# Altium PCB RS485_XBus_Mini.PcbDoc
Units mm, origin at the board's own origin, x right, y up, seen from the top; angles counter-clockwise.
Board outline 48.48 x 24.47 mm, 2 copper layers (Top Layer, Bottom Layer); 57 components, 45 nets, 161 pads, 39 vias.
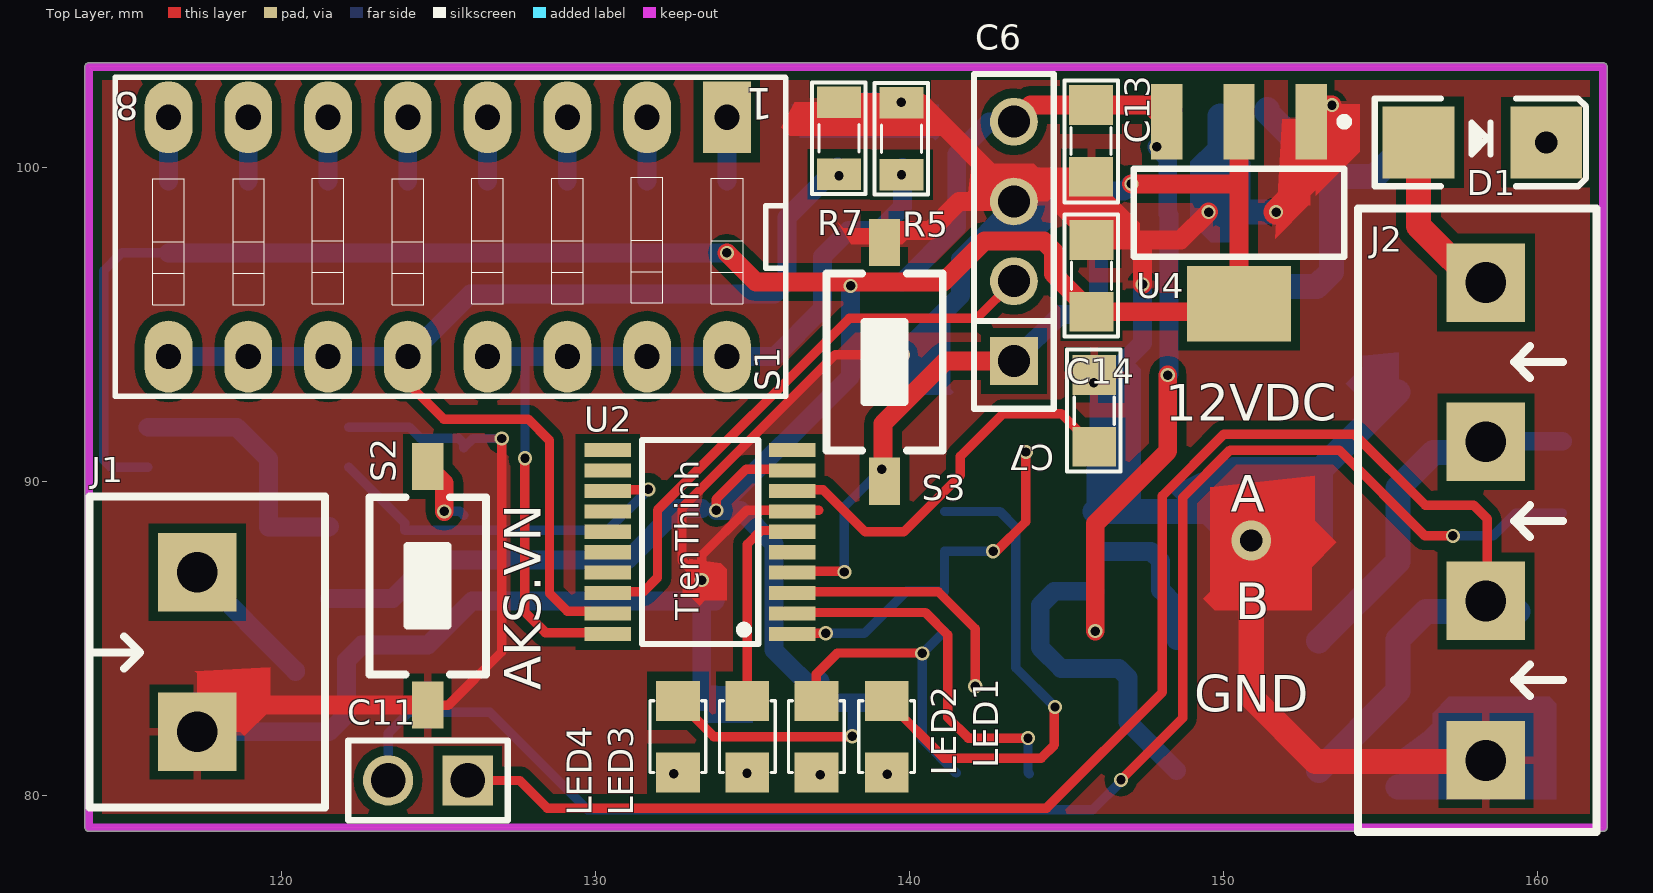
[diagram p0: Top Layer view]
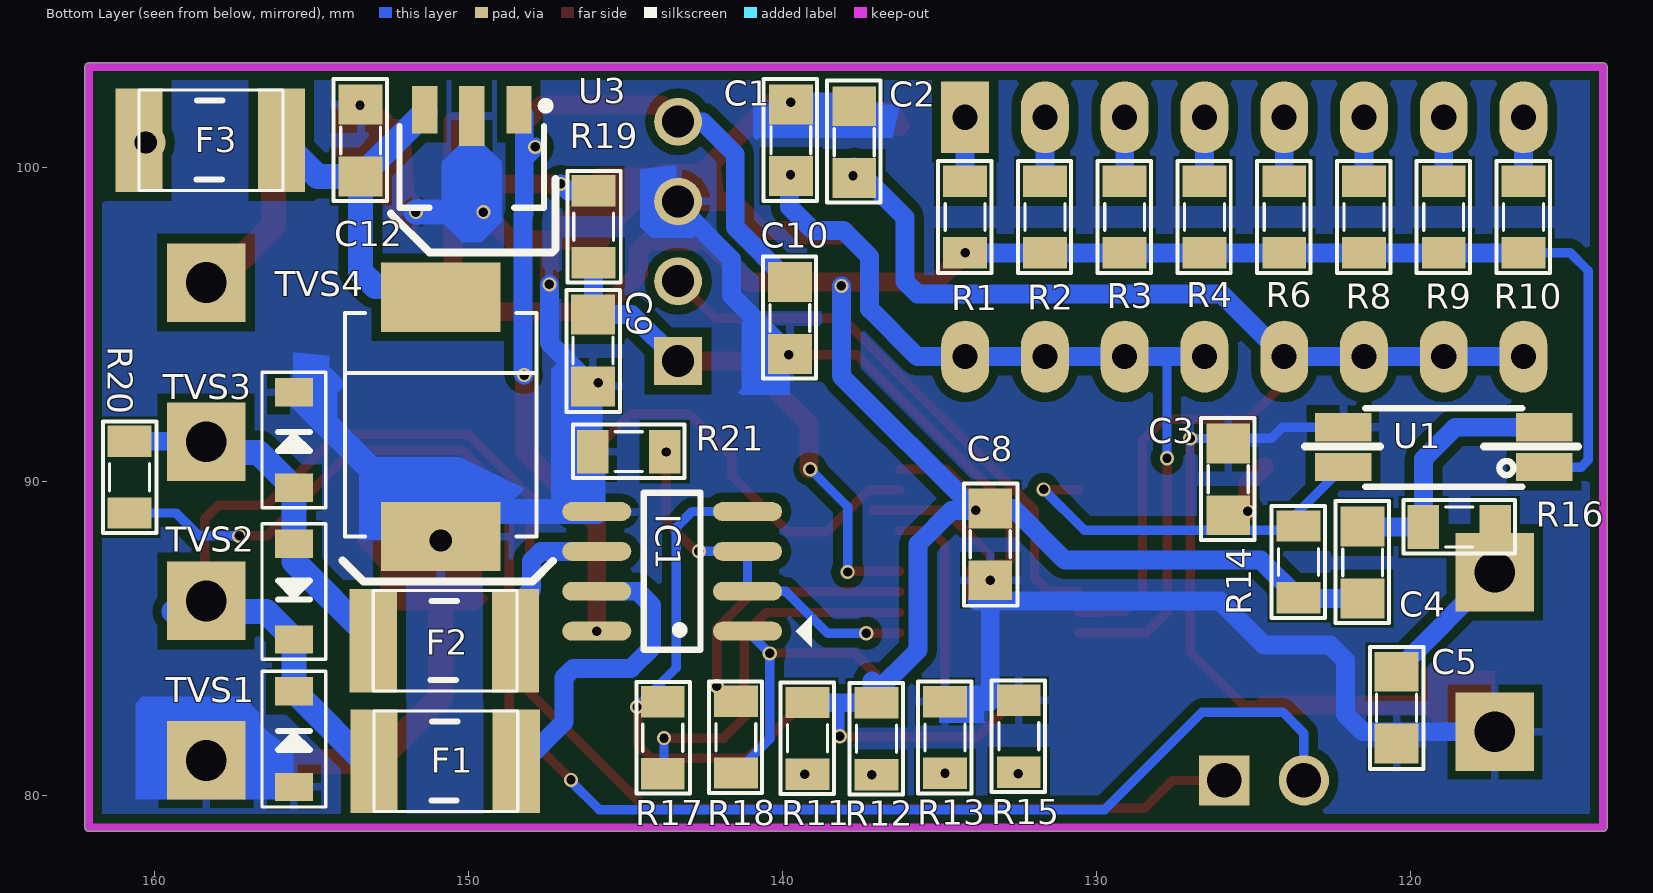
[diagram p1: Bottom Layer view, seen from below]
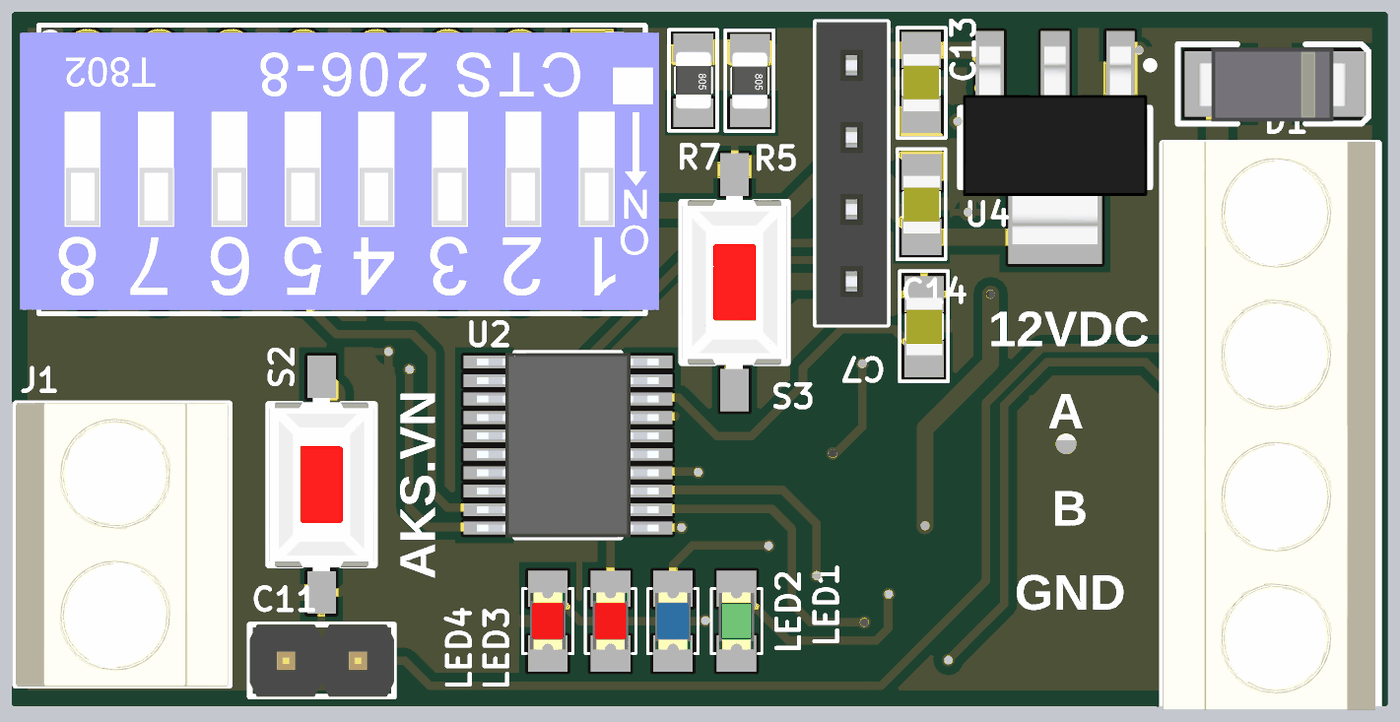
[diagram p2: 3D render of the assembled board from above, using the file's embedded part models]
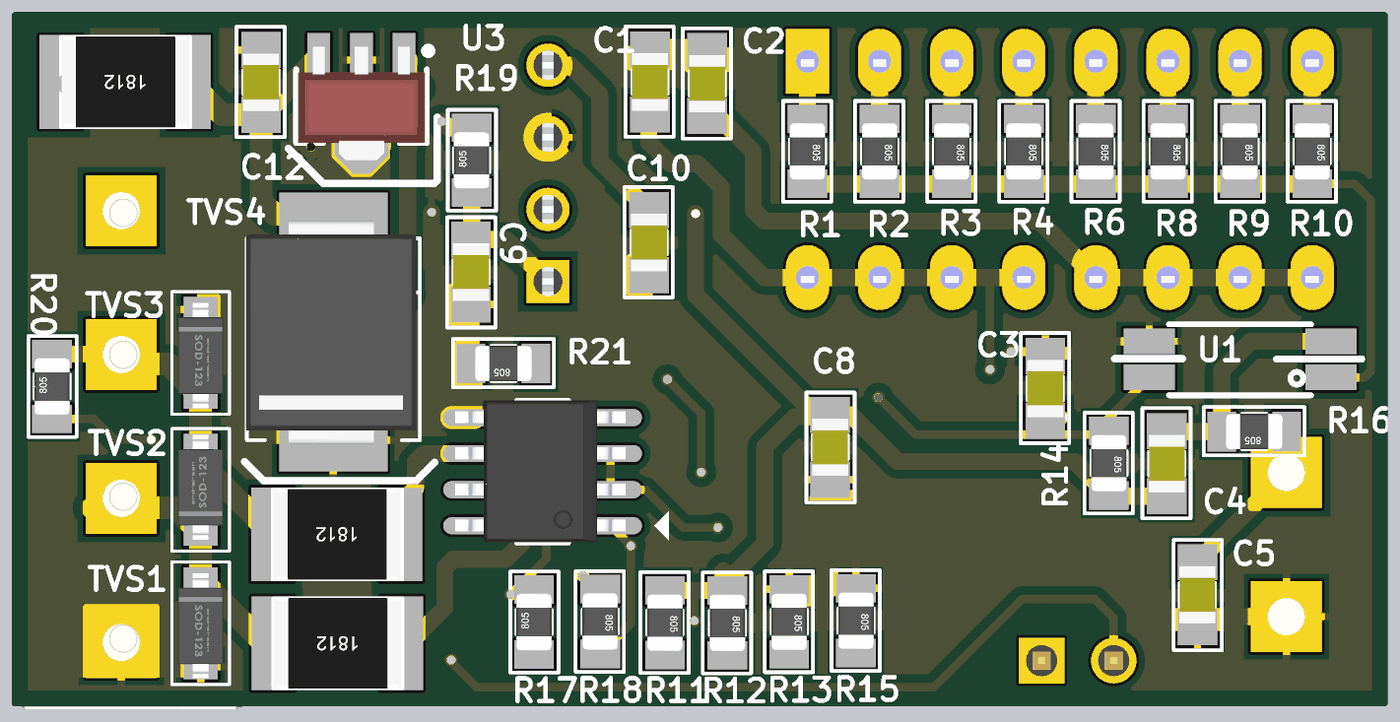
[diagram p3: 3D render of the assembled board from below, using the file's embedded part models]

## Layer stack, top to bottom
Top Solder: solder mask 0.0102, Solder Resist, Dk 3.5
Top Layer: signal copper 0.0356
Dielectric 1: dielectric 0.32, FR-4, Dk 4.8
Bottom Layer: signal copper 0.0356
Bottom Solder: solder mask 0.0102, Solder Resist, Dk 3.5

## Board outline
113.751,78.98 ccw(c113.878,78.98) 113.878,78.853 162.108,78.853 ccw(c162.108,78.98) 162.235,78.98 162.235,103.199 ccw(c162.108,103.199) 162.108,103.326 113.878,103.326 ccw(c113.878,103.199) 113.751,103.199

## Design rules (kind name [scope] priority, off if disabled: settings)
Clearance [All] p1: gap=0.2 ignorepadtopadclearanceinfootprint=FALSE
PolygonConnect [All] p1: connectstyle=Relief reliefconductorwidth=0.254 reliefentries=4 polygonreliefangle="90 Angle" airgapwidth=0.254
RoutingVias [All] p1: holewidth=0.3 width=0.45 viastyle="Through Hole" minholewidth=0.3 minwidth=0.45 maxholewidth=0.8 maxwidth=1.27
SolderMaskExpansion [All] p1: expansion=0.102
Width [All] p1: maxlimit=0.8 minlimit=0.3 preferedwidth=0.6
30 further rules are at their usual default settings.

## Components (designator, comment, footprint, x,y, rotation, side; value= is the part's Value field where it differs from the comment)
C1 "104" SM-0805 139.75,100.86 r270 bottom value=103
C2 "104" SM-0805 137.73,100.8 r270 bottom value=103
C3 "105" SM-0805 125.82,90.06 r270 bottom value=103
C4 "105" SM-0805 121.54,87.41 r270 bottom value=103
C5 "105" SM-0805 120.46,82.79 r90 bottom value=103
C6 "JP4" JP4-C1T 143.34,93.83 r90 top locked
C7 "105" SM-0805 145.9,92.24 r270 top value=103
C8 "105" SM-0805 133.4,87.99 r90 bottom value=103
C9 "104" SM-0805 146.053,94.163 r90 bottom value=103
C10 "104" SM-0805 139.78,95.2 r270 bottom value=103
C11 "JP2" JP2-D1T 125.95,80.47 r180 top
C12 "104" SM-0805 153.45,100.85 r270 bottom value=103
C13 "104" SM-0805 145.796,100.838 r90 top locked value=103
C14 "104" SM-0805 145.81,96.54 r270 top locked value=103
D1 "Diode" DIO-SMD-106 158.26,100.79 r180 top locked
F1 "FUSE" RES-SMD-1812 150.49,81.08 r0 bottom
F2 "FUSE" RES-SMD-1812 150.51,84.92 r0 bottom
F3 "FUSE" RES-SMD-1812 157.97,100.86 r0 bottom
IC1 "MAX485" SO-8 143.53,87.13 r0 bottom
J1 "KF2" KF2-5.08 117.33,84.56 r90 top
J2 "KF4" KF4-5.08 158.37,81.11 r90 top
LED1 "LED" SM-LED-0805-Green 139.29,80.72 r90 top locked
LED2 "LED" SM-LED-0805-Blue 137.05,80.72 r90 top locked
LED3 "LED" SM-LED-0805-Red 134.85,83.006 r270 top locked
LED4 "LED" SM-LED-0805-Red 132.64,83.006 r270 top locked
R1 "82k" RES-SMD-0805 134.198,98.415 r270 bottom
R2 "43k" RES-SMD-0805 131.658,98.415 r270 bottom
R3 "22k" RES-SMD-0805 129.118,98.415 r270 bottom
R4 "12k" RES-SMD-0805 126.578,98.415 r270 bottom
R5 "12k" RES-SMD-0805 139.76,100.907 r270 top locked
R6 "82k" RES-SMD-0805 124.038,98.415 r270 bottom
R7 "12k" RES-SMD-0805 137.77,100.92 r270 top locked
R8 "43k" RES-SMD-0805 121.498,98.415 r270 bottom
R9 "22k" RES-SMD-0805 118.958,98.415 r270 bottom
R10 "12k" RES-SMD-0805 116.418,98.415 r270 bottom
R11 "330R" RES-SMD-0805 139.22,81.81 r270 bottom
R12 "330R" RES-SMD-0805 137.02,81.8 r270 bottom
R13 "330R" RES-SMD-0805 134.84,81.84 r270 bottom
R14 "10k" RES-SMD-0805 123.58,87.43 r270 bottom
R15 "330R" RES-SMD-0805 132.49,81.88 r270 bottom
R16 "150" RES-SMD-0805 118.46,88.54 r0 bottom
R17 "22R" RES-SMD-0805 143.83,81.83 r90 bottom
R18 "22R" RES-SMD-0805 141.5,81.85 r270 bottom
R19 "10k" RES-SMD-0805 146.03,98.103 r90 bottom
R20 "120R" RES-SMD-0805 160.81,90.13 r90 bottom
R21 "10k" RES-SMD-0805 144.91,90.94 r0 bottom
S1 "=partNo" SW-DIP8 134.198,101.59 r180 top locked
S2 "SW" "BUTTON-SMD 2PIN" 124.67,86.67 r90 top
S3 "SW" "BUTTON-SMD 2PIN" 139.22,93.8 r270 top
TVS1 "PSD12C" DIO-SMD-123 155.575,81.788 r270 bottom
TVS2 "PSD12C" DIO-SMD-123 155.575,86.487 r90 bottom
TVS3 "PSD12C" DIO-SMD-123 155.575,91.313 r270 bottom
TVS4 "PSD12C" DIO-SMD-B 150.9,92.05 r270 bottom
U1 "EL3H7 Opto" SSOP4 114.769,93.025 r0 bottom
U2 "STM8S003F3P6" TSOP20 136.523,91.621 r180 top
U3 "78XX" SOT-89-321 147.294,102.849 r0 bottom
U4 "AMS1117" SOT223 150.51,98.55 r180 top locked

## Footprints (in the part's own frame and the unit in brackets; to place one, negate y for a bottom-side part, rotate by r counter-clockwise, add the part's x,y. Pads: shape width x height; smd on the part's side, far side on the other; paste and mask are expansions set on the pad)
"BUTTON-SMD 2PIN" [mm] "Switch SMD type"
  rect 1.5x1 smd: 1(-3.8,0) 2(3.8,0)
  silkscreen extent -2.82,-1.85 2.82,1.85, body extent -3.05,-1.85 3.05,1.85, height 2.5
DIO-SMD-106 [mil]
  rect 90x90.55 smd: 1(80,0) 2(-80,0)
  silkscreen extent -130,-55 135,55, body extent -99,-50 106,52, height 95
DIO-SMD-123 [mm]
  rect 0.9x1.2 smd: 1(1.524,0) 2(-1.524,0)
  silkscreen extent -2.16,-1.02 2.16,1.02, body extent -1.76,-0.8 1.94,0.8, height 1.25
DIO-SMD-B [mm] "Magnetic-Core Inductor with Winding Polarity Marking; 2 Leads"
  rect 2.2x3.81 smd: 1(3.81,0) 2(-3.81,0)
  silkscreen extent -3.3,-3.05 3.81,3.05, body extent -3.94,-3.08 3.96,2.92, height 2.13
JP2-D1T [mm] "2 pins, 1 row, straight, gold plating"
  rect 1.6x1.6 hole 1.1: 1(0,0)
  round 1.6 hole 1.1: 2(2.54,0)
  silkscreen extent -1.27,-1.27 3.81,1.27, body extent -1.27,-1.27 3.81,1.27, height 8.54
JP4-C1T [mm] "4 row, straight, gold plating"
  rect 1.52x1.52 hole 1.02: 1(0,0)
  round 1.52 hole 1.02: 2(2.54,0) 3(5.08,0) 4(7.62,0)
  silkscreen extent -1.52,-1.27 9.14,1.27, body extent -1.52,-1.25 9.14,1.25, height 8.51
KF2-5.08 [mm]
  rect 2.5x2.5 hole 1.3: 1(-2.54,0) 2(2.54,0)
  silkscreen extent -4.95,-4.08 4.95,3.43, body extent -5,-4.07 5,3.43, height 10
KF4-5.08 [mm]
  rect 2.5x2.5 hole 1.3: 1(0,0) 2(5.08,0) 3(10.147,0) 4(15.215,0)
  silkscreen extent -2.29,-3.53 17.58,4.06, body extent -2.36,-3.43 17.64,4.07, height 10
RES-SMD-0805 [mil]
  rect 39.37x55 smd: 1(-45,0) 2(45,0)
  silkscreen extent -70,-34 70,33, body extent -39,-25 39,25, height 31
RES-SMD-1812 [mm] "Chip Capacitor, Body 3.2x2.5mm, IPC Medium Density"
  rect 1.5x3.3 smd: 1(-1.996,0) 2(2.54,0)
  silkscreen extent -2.04,-1.6 2.54,1.6, body extent -2,-1.6 2.5,1.6, height 0.6
SM-0805 [mil] "Compoment SMD 80x50mil"
  rect 50x55 smd: 1(-45,0) 2(45,0)
  silkscreen extent -77,-34 76,33, body extent -40,-25 40,25, height 24
SM-LED-0805-Blue [mil]
  rect 50x55 smd: 1(0,0) 2(90,0)
  silkscreen extent 0,-35 90,35, body extent 5,-25 85,25, height 43
SM-LED-0805-Green [mil]
  rect 50x55 smd: 1(0,0) 2(90,0)
  silkscreen extent 0,-35 90,35, body extent 5,-25 85,25, height 43
SM-LED-0805-Red [mil]
  rect 50x55 smd: 1(0,0) 2(90,0)
  silkscreen extent 0,-35 90,35, body extent 5,-25 85,25, height 43
SO-8 [mm] "8-Pin Small Outline Integrated Circuit 1.27 mm Pitch, IPC Medium Density"
  oval 2.2x0.6 smd: 1(-2.4,1.905) 2(-2.4,0.635) 3(-2.4,-0.635) 4(-2.4,-1.905) 5(2.4,-1.905) 6(2.4,-0.635) 7(2.4,0.635) 8(2.4,1.905)
  silkscreen extent -4.44,-2.5 0.9,2.5, body extent -2.93,-2.51 3.08,2.49, height 1.75
SOT223 [mm]
  rect 1x2.4 smd: 1(-2.3,-2.9) 2(0,-2.9) 3(2.3,-2.9)
  rect 3.3x2.4 smd: 4(0,2.9)
  silkscreen extent -3.48,-3.02 3.35,1.4, body extent -3.25,-3.56 3.25,3.4, height 1.68
SOT-89-321 [mm]
  rect 0.8x1.5 smd: 1(4.116,1.019) 3(1.116,1.019)
  rect 0.8x1.9 smd: 2(2.616,1.219)
  Top Layer region: 2.316,2.032 1.666,2.682 1.666,4.582 2.316,5.232 2.916,5.232 3.566,4.582 3.566,2.682 2.916,2.032
  silkscreen extent 0.14,0.77 4.92,4.14, body extent 0.37,0.74 4.87,4.74, height 1.5
SSOP4 [mm]
  rect 1.8x0.9 smd: 1(0.991,2.575) 2(0.991,1.305) 3(7.391,1.305) 4(7.391,2.575)
  silkscreen extent 1.69,0.71 6.69,3.2, body extent 1.52,0.64 6.73,3.3, height 2
SW-DIP8 [mil] "16 PIN, W 300mil, Pin to pin 100mil For Switch"
  rect 60x90 hole 31.5: 1(0,0)
  oval 60x90 hole 31.5: 2(100,0) 3(200,0) 4(300,0) 5(400,0) 6(500,0) 7(600,0) 8(700,0) 9(700,300) 10(600,300) 11(500,300) 12(400,300) 13(300,300) 14(200,300) 15(100,300) 16(0,300)
  silkscreen extent -74,-50 767,350, body extent -93,-40 793,345, height 325
TSOP20 [mm]
  rect 1.475x0.45 smd: 1(0.237,6.481) 2(0.237,5.831) 3(0.237,5.181) 4(0.237,4.531) 5(0.237,3.881) 6(0.237,3.231) 7(0.237,2.581) 8(0.237,1.931) 9(0.237,1.281) 10(0.237,0.631) 11(6.113,0.631) 12(6.113,1.281) 13(6.113,1.931) 14(6.113,2.581) 15(6.113,3.231) 16(6.113,3.881) 17(6.113,4.531) 18(6.113,5.181) 19(6.113,5.831) 20(6.113,6.481)
  silkscreen extent 1.33,0.31 5.02,6.81, body extent -0.02,0.31 6.38,6.81, height 1.2

## Part data
C1 C2 C3 C4 C5 C7 C8 C9 C10 C12 C13 C14: library part CM, "Cap SMD"
C6: "WR-PHD 2.54 mm Angled Socket Header", Manufacturer="Würth Elektronik eiSos GmbH", partNo=613004143121, ComponentLink1 Description=Manufacturer, ComponentLink1URL=http://www.we-online.com, ComponentLink2 Description=Datasheet, ComponentLink2URL=http://katalog.we-online.de/em/datasheet/6130xx143121.pdf, Created by="Karrer Zheng", Created Date="29 March 2013", NoPins=04
C11: "WR-PHD 2.54 mm Angled Socket Header", Manufacturer="Würth Elektronik eiSos GmbH", partNo=613002143121, ComponentLink1 Description=Manufacturer, ComponentLink1URL=http://www.we-online.com, ComponentLink2 Description=Datasheet, ComponentLink2URL=http://katalog.we-online.de/em/datasheet/6130xx143121.pdf, Created by="Karrer Zheng", Created Date="29 March 2013", NoPins=02
IC1: "RS232 - RS485 (Same sn75176)"
J1: Manufacturer="Würth Elektronik eiSos GmbH", partNo=691103110002, ComponentLink1 Description=Manufacturer, ComponentLink1URL=http://www.we-online.com, ComponentLink2 Description=Datasheet, ComponentLink2URL=http://katalog.we-online.de/em/datasheet/6911031100xx.pdf, Created by="Karrer Zheng", Created Date="29 October 2013", NoPins=2
J2: Manufacturer="Würth Elektronik eiSos GmbH", partNo=691133710004, ComponentLink1 Description=Manufacturer, ComponentLink1 URL=http://www.we-online.com, ComponentLink2 Description=Datasheet, ComponentLink2 URL=http://katalog.we-online.de/em/datasheet/6911337100xx.pdf, Created by="Baojun Chen", Created Date=4-Aug-15, NoPins=4
R1 R2 R3 R4 R5 R6 R7 R8 R9 R10 R11 R12 R13 R14 R15 R16 R17 R18 R19 R20 R21: library part R, "Resistor R1/4W"
S1: library part SWDIP8, "WS-DITV 2.54 mm small compact THT flat actuator with top tape", Manufacturer="Wurth Elektronik", Part No.=418127160908, ComponentLink1 Description=Manufacturer, ComponentLink1URL=http://www.we-online.com, ComponentLink2 Description=Datasheet, ComponentLink2URL=http://katalog.we-online.de/em/datasheet/4181271609xx.pdf, Created by="Baojun Chen", Created Date=Dec.2015, Pole=08
S2 S3: library part SW-Button, "Switch-Button", LatestRevisionDate=17-Jul-2002, LatestRevisionNote="Re-released for DXP Platform.", PackageReference=SPST-2, Published=24-Mar-1999, Publisher="Altium Limited"
TVS1 TVS2 TVS3 TVS4: library part "Diode TVS"
U2: "MCU 8BIT 8KB FLASH TSSOP20"
U3: library part LM78XX
U4: library part AMS117

## Via types
v1: diameter 0.45, hole 0.3, Top Layer to Bottom Layer, tented both sides, 37 vias
v2: diameter 1.27, hole 0.711, Top Layer to Bottom Layer, tented both sides, 2 vias

## Nets (pads, with @x,y where several pads share a name; then routed paths per layer and width w, separated by ;. In a path a pad name is that pad's centre, name@x,y a point inside that pad or via, vN(x,y) a via of type N, cw(c..) or ccw(c..) an arc to the next point about the centre after c; other vN are vias at no path point)
+3.3V: C4.2 C8.2 C14.2 LED4.1 R1.2 R2.2 R3.2 R4.2 R6.2 R8.2 R9.2 R10.2 R11.1 R12.1 R14.2 R19.2 U1.1 U2.9 U4.2 U4.4 | length 99.8
  Top Layer w0.3: LED4.1 133.786,81.86 138.17,81.86 v1(138.19,81.88) ; v1(133.86,89.07) 133.86,89.43 134.81,90.38 U2.9@136.28,90.38
  Top Layer w0.6: v1(134.198,97.272) 135.13,96.34 141.09,96.34 142.4,97.65 144.29,97.65 144.6,97.34 144.6,96.607 C14.2 150.257,95.397 U4.4 150.51,99.47 ; v1(147.08,99.47) 150.51,99.47 ; U4.2 150.51,99.47
  Bottom Layer w0.3: U1.1 114.58,90.45 114.355,90.675 114.355,96.705 114.922,97.272 R10.2 ; v1(138.19,81.88) 138.19,82.893 138.24,82.943
  Bottom Layer w0.6: R10.2 R9.2 R8.2 R6.2 R4.2 R3.2 R2.2 v1(134.198,97.272) ; C4.2 123.56,86.267 R14.2 124.783,87.49 131.02,87.49 132.663,89.133 C8.2 ; 137.17,83.64 R12.1@137.17,83.15 ; R12.1@137.36,82.96 R12.1@137.17,83.15 ; v1(138.14,96.22) 138.14,93.35 v1(133.86,89.07) 134.63,89.07 135.7,88 135.7,84.62 R12.1@137.17,83.15 ; R11.1@139.31,82.953 139.3,82.943 138.24,82.943 137.17,82.943 R12.1@137.17,83.15 ; R19.2 146.846,99.246 147.07,99.47 v1(147.08,99.47)
+5V: C6.4 C10.1 C13.2 IC1.8 U3.3 U4.3 | length 30.5
  Top Layer w0.6: C6.4 143.871,101.981 C13.2 147.679,101.981 U4.3 ; v1(145.93,85.225) 145.93,88.65 148.24,90.96 v1(148.24,93.38)
  Bottom Layer w0.6: C10.1 141.52,98.083 141.52,100.42 142.55,101.45 C6.4 ; v1(147.89,100.65) 147.89,100.64 148.24,100.29 ; v1(148.24,93.38) 148.28,93.42 148.28,98.475 148.24,98.515 148.24,100.29 ; U3.3 148.24,101.66 148.24,100.29
DIP_SW0: C1.2 R5.2 S1.13 S1.14 S1.15 S1.16 U2.20 | length 29.5
  Top Layer w0.3: v1(127.77,90.73) 127.77,90.68 127.76,90.67 127.76,85.84 128.42,85.18 U2.20@130.58,85.18
  Bottom Layer w0.3: S1.13 S1.13@127.134,94.526 ; 127.69,93.97 127.77,93.89 v1(127.77,90.73)
  Bottom Layer w0.6: S1.13 127.69,93.97 S1.14 S1.15 S1.16 135.72,93.97 137.24,95.49 137.24,97.15 138.07,97.98 139.04,97.98 139.79,98.73 C1.2@139.79,99.994
  other v1: 139.76,99.764
DIP_SW1: C2.2 R7.2 S1.9 S1.10 S1.11 S1.12 U2.19 | length 38.3
  Top Layer w0.3: S1.12 124.038,93.122 125.181,91.979 127.871,91.979 128.55,91.3 128.55,86.43 129.115,85.865 129.825,85.865 129.86,85.83 U2.19@130.58,85.83 ; v1(137.77,99.73) R7.2
  Bottom Layer w0.6: S1.9 S1.10 S1.11 S1.12 126.028,95.96 135.71,95.96 136.11,96.36 136.11,98.397 C2.2@137.73,100.017
ERROR: LED3.1 U2.6 | length 7.1
  Top Layer w0.3: LED3.1@134.79,83.066 LED3.1@134.83,83.026 ; LED3.1@134.83,82.57 LED3.1@134.83,83.026 ; U2.6@136.28,88.43 135.29,88.43 134.85,87.99 LED3.1 LED3.1@134.83,83.026
GND: C1.1 C2.1 C3.1 C5.1 C6.3 C7.1 C8.1 C9.1 C10.2 C12.1 C13.1 C14.1 IC1.5 J1.1 J2.1 R5.1 R7.1 R13.1 R15.1 R21.2 S2.1 S3.1 TVS1.1 TVS3.2 TVS4.1 U1.3 U2.7 U3.2 U4.1 | length 140.6
  Top Layer w0.3: S2.1 125.33,82.87 127.03,84.57 v1(127.03,91.36) ; 137.13,89.08 134.84,89.08 133.4,87.64 v1(133.4,86.85) 132.77,87.48 132.77,89.153 137.647,94.03 v1(139.81,94.03) ; v1(145.88,93.14) 145.9,93.16 C7.1
  Top Layer w0.6: J1.1 118.18,82.87 S2.1 ; R7.1 v1(139.747,102.063) R5.1@139.76,102.063 ; S3.1@139.17,97.98 140.67,97.98 141.6,98.91 C6.3 ; R5.1 140.37,102.05 143.34,99.08 C6.3 ; v1(147.44,96.27) 147.44,97.673 147.43,97.683 ; v1(149.54,98.57) 148.653,97.683 147.43,97.683 ; U4.1 153.34,101.98 v1(153.47,101.98) ; C6.3 144.125,99.695 C13.1 145.796,97.697 C14.1 147.43,97.683
  Top Layer w0.8: v2(150.9,88.11) 150.9,83.13 152.95,81.08 158.061,81.08 J2.1@158.369,80.772 ; v1(151.69,98.57) 152.81,99.69 U4.1
  Bottom Layer w0.3: U1.3 124.09,91.72 124.44,91.37 125.653,91.37 C3.1 125.82,91.07 126.11,91.36 v1(127.03,91.36)
  Bottom Layer w0.6: J1.1 J1.1@117.777,82.02 ; J1.1@117.616,82.181 J1.1@117.777,82.02 ; J1.1@118.094,81.703 J1.1@117.777,82.02 ; v1(133.4,86.85) C8.1 133.4,86.19 ; 133.83,86.19 133.4,86.19 ; R13.1 133.4,82.983 133.4,86.19 ; C2.1@137.7,102.073 139.737,102.073 v1(139.747,102.063) ; C10.2@139.781,94.058 141.64,95.917 141.64,97.072 143.34,98.772 C6.3 ; R21.2@146.053,90.5 R21.2 C9.1 147.44,94.407 v1(147.44,96.27) ; J1.1@117.777,82.02 121.53,82.02 122.09,82.58 122.09,84.3 122.57,84.78 124.68,84.78 126.09,86.19 133.4,86.19
  Bottom Layer w0.8: R21.2@146.053,90.5 146.053,89.158 IC1.5 150.105,89.035 TVS4.1 ; v1(149.54,98.57) v1(151.69,98.57) ; 149.91,98.84 U3.2 ; TVS4.1@150.978,88.24 TVS3.2 ; TVS1.1 157.861,80.264 J2.1@158.369,80.772
HID_P2_3: U2.12
HID_P2_4: U2.11
INPUT1: C3.2 R14.1 S2.2 U1.4 U2.13 | length 14.5
  Top Layer w0.3: U2.13@130.58,89.73 131.69,89.73 v1(131.7,89.74)
  Top Layer w0.6: S2.2 125.2,89.94 v1(125.2,89.04)
  Bottom Layer w0.3: U1.4 123.94,88.67 123.94,88.44 130.4,88.44 v1(131.7,89.74) ; v1(125.2,89.04) 125.697,89.04 C3.2
LINE_METER: U2.14
MAX_DIR: IC1.2 IC1.3 R21.1 U2.1 | length 11.7
  Top Layer w0.3: U2.1@136.28,85.18 136.3,85.16 v1(137.35,85.16) ; v1(142.68,87.77) 142.76,87.77 142.77,87.76 143.72,88.71 v1(143.72,90.93)
  Bottom Layer w0.3: v1(137.35,85.16) 138.58,85.16 139.915,86.495 IC1.2 IC1.3 v1@142.525,87.765
NetC4_1: C4.1 R16.2 U1.2 | length 8.4
  Bottom Layer w0.6: U1.2 118.59,91.72 119.603,90.707 R16.2 121.527,88.54 C4.1
NetC5_2: C5.2 J1.2 R16.1 | length 4.5
  Bottom Layer w0.6: J1.2 120.46,83.97 C5.2
NetC11_2: C11.2 R20.1 | length 50.8
  Top Layer w0.3: v1(146.75,80.49) 148.72,82.46 148.72,89.483 150.227,90.99 153.7,90.99 156.43,88.26 v1(157.32,88.26)
  Bottom Layer w0.3: C11.2 123.41,81.97 124.08,82.64 126.655,82.64 129.757,79.538 145.848,79.538 146.75,80.44 v1(146.75,80.49) ; v1(157.32,88.26) 158.6,88.26 159.327,88.987 R20.1
NetD1_1: D1.1 J2.4 | length 5.7
  Top Layer w0.8: D1.1 156.228,98.128 J2.4@158.369,95.987
NetD1_2: D1.2 F3.2
  other v2: 160.292,100.79
NetF1_1: F1.1 IC1.7 | length 10.1
  Bottom Layer w0.6: IC1.7 144.625,86.495 144.18,86.05 144.18,84.7 144.84,84.04 146.68,84.04 146.97,83.75 146.97,82.334 F1.1@148.514,80.79
NetF2_1: F2.1 IC1.6 | length 5
  Bottom Layer w0.6: IC1.6 147.705,87.765 148.01,87.46 148.01,86.54 148.495,86.055 148.495,84.939 F2.1
NetLED1_1: LED1.1 R11.2
  other v1: 139.31,80.667
NetLED2_1: LED2.1 R12.2
  other v1: 137.17,80.657
NetLED3_2: LED3.2 R13.2
  other v1: 134.84,80.697
NetLED4_2: LED4.2 R15.2
  other v1: 132.51,80.69
NetR1_1: R1.1 S1.1 | length 2
  Bottom Layer w0.6: R1.1 S1.1
NetR2_1: R2.1 S1.2 | length 2
  Bottom Layer w0.6: R2.1 S1.2
NetR3_1: R3.1 S1.3 | length 2
  Bottom Layer w0.6: R3.1 S1.3
NetR4_1: R4.1 S1.4 | length 2
  Bottom Layer w0.6: R4.1 S1.4
NetR6_1: R6.1 S1.5 | length 2
  Bottom Layer w0.6: R6.1 S1.5
NetR8_1: R8.1 S1.6 | length 2
  Bottom Layer w0.6: R8.1 S1.6
NetR9_1: R9.1 S1.7 | length 2
  Bottom Layer w0.6: R9.1 S1.7
NetR10_1: R10.1 S1.8 | length 2
  Bottom Layer w0.6: R10.1 S1.8
NetR17_1: R17.1 U2.2 | length 11.9
  Top Layer w0.3: U2.2@136.28,85.82 140.52,85.82 141.235,85.105 141.235,82.475 141.89,81.82 v1(143.79,81.82)
  Bottom Layer w0.3: v1(143.79,81.82) 143.79,80.727 R17.1
NetR18_1: R18.1 U2.3 | length 8.1
  Top Layer w0.3: U2.3@136.28,86.48 140.93,86.48 142.11,85.3 v1(142.11,83.47)
RC522_RST: C6.1 C9.2 R19.1 S3.2 U2.4 | length 16.9
  Top Layer w0.3: U2.4@136.28,87.13 137.92,87.13 v1(137.94,87.11) ; v1(139.13,90.38) 139.15,90.4 S3.2@139.17,90.38
  Top Layer w0.6: S3.2@139.17,90.38 139.17,91.83 141.17,93.83 C6.1
  Bottom Layer w0.3: v1(137.94,87.11) 137.94,89.19 v1(139.13,90.38)
  Bottom Layer w0.6: C6.1 144.816,95.306 C9.2 146.03,95.329 R19.1
RC522_SCK: U2.15
RC522_SDA: U2.10
RC522_SDI: U2.17
RC522_SDO: U2.16
RELAY: U2.5
RFID_EN: C6.2 U2.18 | length 18.1
  Top Layer w0.3: U2.18@130.58,86.48 131.54,86.48 131.99,86.93 131.99,89.08 138.1,95.19 142.16,95.19 C6.2
RJ45-1: F2.2 J2.3 R20.2 TVS2.1 TVS3.1 | length 12.4
  Bottom Layer w0.6: J2.3 158.386,91.273 R20.2
  Bottom Layer w0.8: F2.2 155.575,87.445 TVS2.1 TVS3.1 156.705,90.919 J2.3@159.144,90.919
RJ45-2: C11.1 F1.2 J2.2 TVS1.2 TVS2.2 | length 54.1
  Top Layer w0.3: C11.1 127.6,80.47 128.48,79.59 144.38,79.59 148.07,83.28 148.07,89.54 150.02,91.49 154.19,91.49 156.44,89.24 157.98,89.24 158.41,88.81 158.41,86.68 J2.2@158.37,86.64
  Bottom Layer w0.8: F1.2@153.05,80.79 155.575,83.315 TVS2.2 156.464,85.852 J2.2@159.385,85.852
RS485_RX: IC1.4 LED1.2 R17.2 | length 16.2
  Top Layer w0.3: LED1.2 141.113,81.183 144.211,81.183 144.63,81.602 144.63,82.8 144.64,82.81 v1(144.65,82.81)
  Bottom Layer w0.3: IC1.4 142.895,89.035 143.4,88.53 143.4,84.06 v1(144.65,82.81)
RS485_TX: IC1.1 LED2.2 R18.2 | length 9.8
  Top Layer w0.3: LED2.2 137.05,83.86 137.72,84.53 v1@140.42,84.53
  Bottom Layer w0.3: IC1.1 v1(140.42,84.515) 140.42,81.787 R18.2
VCAP: C7.2 U2.8 | length 12.5
  Top Layer w0.3: U2.8@136.28,89.73 137.26,89.73 138.605,88.385 139.83,88.385 141.63,90.185 141.63,90.79 142.99,92.15 144.847,92.15 C7.2
VIN: C12.2 F3.1 TVS4.2 U3.1 | length 11.9
  Bottom Layer w0.8: TVS4.2 151.24,96.2 152.98,96.2 153.45,96.67 C12.2 ; U3.1 151.41,101.747 C12.2 ; F3.1 154.821,99.707 C12.2

## Polygon pours and split planes (outlines as drawn)
GND on Top Layer (solid, remove dead copper, pour order 20): 113.878,103.199 113.878,78.98 162.108,78.98 162.108,103.199
no net on Top Layer "Top Layer-No Net" (solid, remove dead copper, pour order 10): 113.878,103.199 113.98,103.097 113.98,78.98 162.108,78.98 162.108,103.199
GND on Bottom Layer (solid, remove dead copper, pour order 22): 113.878,103.199 113.878,78.98 162.108,78.98 162.108,103.199

## Keep-outs
Keep-Out Layer:
  lines w0.254: 113.878,78.98 113.878,103.199 162.108,103.199 162.108,78.98 113.878,78.98

## Other copper
Top Layer:
  region net GND: 117.26,83.95 117.33,83.88 117.33,82.02 118.707,82.02 118.834,81.893 119.65,82.709 119.65,84.08
  region net GND: 132.997,87.53 132.997,87.217 132.75,86.97 132.8,86.92 132.8,86.29 133.08,86.29 133.33,86.04 133.5,86.21 134.19,86.21 134.19,87.2 134.01,87.38
  region net GND: 137.73,98.24 137.91,98.06 140.16,98.06 140.16,97.913 139.787,97.54 138.16,97.54
  region net GND: 136.36,102.063 140.677,102.063 141.28,101.46 141.28,101 136.2,101 135.93,101.27
  region net GND: 142,100.107 143.973,100.107 144.79,99.29 144.42,98.92 141.85,98.92
  region net GND: 144.382,99.777 144.591,99.568 145.994,99.568 147.35,98.212 147.35,97.43 145.794,97.43 144.54,98.684 144.54,99.11
  region net GND: 152.91,101.91 153.01,102.01 154.35,102.01 154.35,100.49 152.95,99.09
  region net GND: 151.89,101.529 152.721,101.529 153.08,101.17 152.78,100.87 152.78,98.79 152.72,98.79 151.66,97.73
  region net GND: 149.59,89.814 149.59,86.48 149.37,86.26 149.74,85.89 152.82,85.89 152.82,87.26 153.61,88.05 152.92,88.74 152.92,90.18
Bottom Layer:
  region net GND: 155.6,81.41 155.6,80.162 155.575,80.137 155.842,79.87 160.62,79.87 160.62,82.92 160.41,83.13 157.19,83.13 156.675,82.615 156.675,82.285 156.41,82.02
  region net GND: 155.6,94.106 155.6,92.46 154.96,91.82 154.2,91.82 154.2,92.82 153.91,93.11 154.45,93.65 154.45,94
  region net GND: 148.23,89.76 149.86,88.13 153.5,88.13 153.5,90.55 153.66,90.71 153.6,90.77 150.28,90.77
  region net GND: 146.78,93.76 146.78,93.747 145.926,92.893 146.057,92.762 146.057,89.162 147.248,89.162 147.38,89.03 147.38,93.57 147.15,93.8
  region net GND: 143.4,100.08 143.4,98.88 142.62,98.1 142.62,97.83 142.77,97.83 142.85,97.75 144.2,97.75 144.55,98.1 144.55,99.93
  region net GND: 136.26,102 136.27,101.99 140.94,101.99 140.94,100.949 140.843,100.852 140.755,100.94 136.52,100.94
  region net GND: 135.02,83.42 135.03,83.41 135.03,82.303 133.547,82.303 133.61,82.366 133.61,83.51
  region net GND: 139.81,94.03 139.79,94.01 139.79,92.75 141.33,92.75 141.42,92.84 141.31,92.95 141.31,95.06 141.27,95.1

## Silkscreen, mask and mechanical layers (free items; w line width, h text height)
Top Overlay:
  text "8" at 115.48,102.69 h1.52 r180
  text "12VDC" at 148.16,91.55 h2
  text "A" at 150.25,88.65 h2
  text "TienThinh" at 133.56,85.58 h1.3 r90
  text "B" at 150.39,85.23 h2
  text "AKS.VN" at 128.66,83.34 h2 r90
  text "GND" at 149.08,82.27 h2
Bottom Overlay:
  lines w0.254: 114.68,91.1 117.67,91.1 ; 120.99,91.11 123.38,91.11 ; 147.24,99.62 147.24,97.39 147.35,97.28 147.42,97.28 151.25,97.28 152.49,98.52 ; 147.33,87.46 147.98,86.81 153.36,86.81 154.03,87.48

## Text inside footprints (layer, text, board x,y; h text height)
S1: Top Overlay "1" at 135.67,102.51 h1 r180